# Altium PCB DC-DC StepDown in Box 45x30x15 (moto).PcbDoc
Units mm, origin at the board's own origin, x right, y up, seen from the top; angles counter-clockwise.
Board outline 42 x 27 mm, 2 copper layers (Top Layer, Bottom Layer); 5 components, 4 nets, 22 pads, 0 vias.
Unrouted connection lines stored in the file: 1.
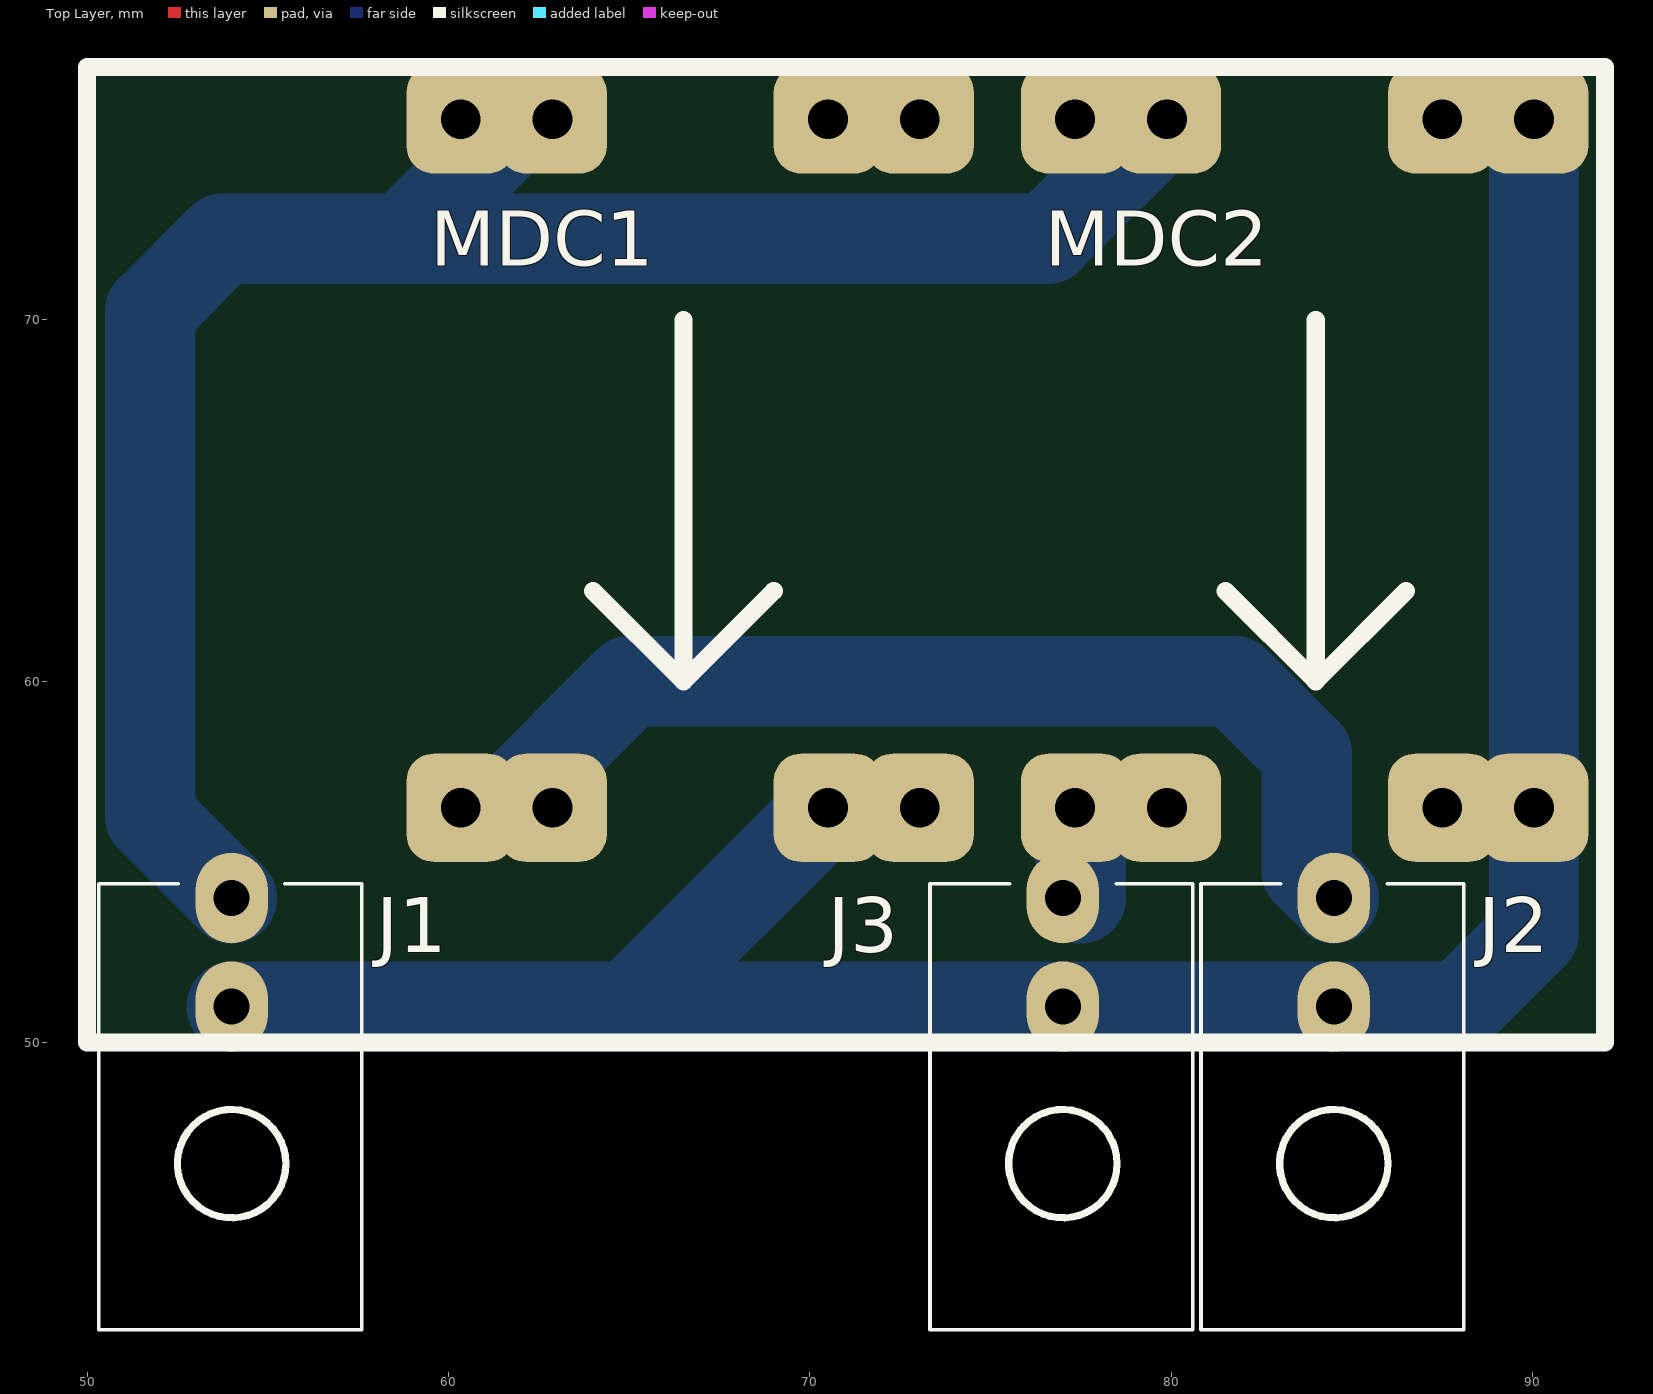
[diagram p0: Top Layer view]
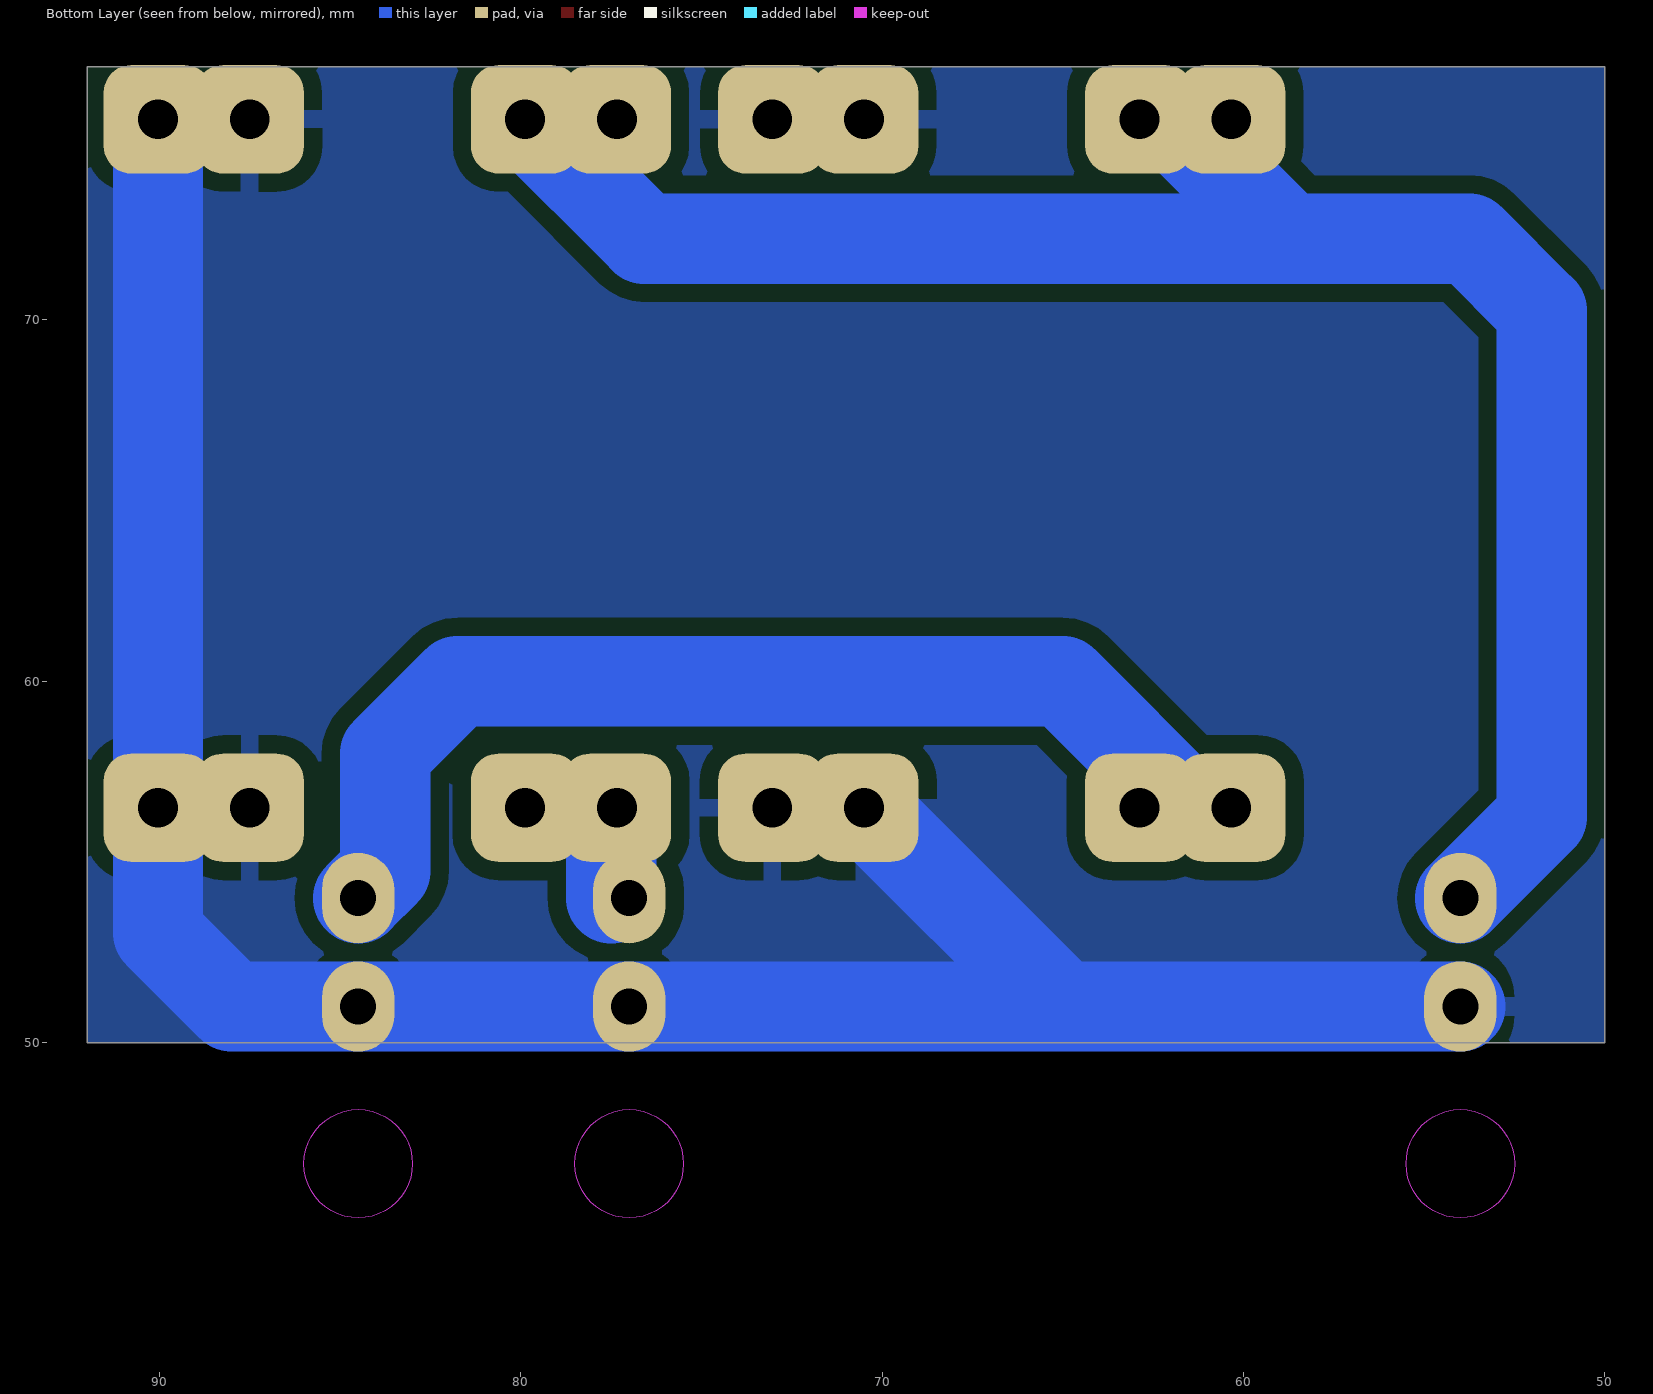
[diagram p1: Bottom Layer view, seen from below]

## Layer stack, top to bottom
Top Solder: solder mask 0.0102, Solder Resist, Dk 3.5
Top Layer: signal copper 0.0356
Dielectric 1: dielectric 0.32, FR-4, Dk 4.8
Bottom Layer: signal copper 0.0356
Bottom Solder: solder mask 0.0102, Solder Resist, Dk 3.5

## Board outline
50,50 92,50 92,77 50,77

## Design rules (kind name [scope] priority, off if disabled: settings)
Clearance [All] p1: gap=0.5 ignorepadtopadclearanceinfootprint=FALSE
ComponentClearance [All] p1: gap=0.01 collisioncheckmode=3 verticalgap=0.2 showdistances=FALSE
Height [All] p1: minheight=0 maxheight=25 prefheight=12.7
HoleSize [All] p1: absolutevalues=TRUE maxlimit=3.2 minlimit=0.4 maxpercent=80.000 minpercent=20.000
HoleToHoleClearance [All] p1: gap=0.2 allowstackedmicrovias=TRUE
PlaneClearance [All] p1: clearance=0.5
PlaneConnect [All] p1: planeconnectstyle=Relief reliefexpansion=0.508 reliefentries=4 reliefconductorwidth=0.5 reliefairgap=0.5
PolygonConnect [All] p1: connectstyle=Relief reliefconductorwidth=0.5 reliefentries=4 polygonreliefangle="90 Angle" airgapwidth=0.5
RoutingVias [All] p1: holewidth=0.7 width=1.5 viastyle="Through Hole" minholewidth=0.4 minwidth=0.4 maxholewidth=3.2 maxwidth=7
SilkToSilkClearance [All] p1: silktosilkclearance=0.05
SilkToSolderMaskClearance [IsPad] p1: minsilkscreentomaskgap=0.2 clearancetoexposedcopper=TRUE
SolderMaskExpansion [All] p1: expansion=0.1
Width [All] p1: maxlimit=3 minlimit=0.2 preferedwidth=0.5
22 further rules are at their usual default settings.

## Components (designator, comment, footprint, x,y, rotation, side; value= is the part's Value field where it differs from the comment)
J1 "IN" "Molex Micro-Fit 3.0 - 2 pin D R" 54,51 r0 top
J2 "Out 1" "Molex Micro-Fit 3.0 - 2 pin D R" 84.5,51 r0 top
J3 "Out 2" "Molex Micro-Fit 3.0 - 2 pin D R" 77,51 r0 top
MDC1 "DC-DC" DC-DC_MP1584N 60.34,75.55 r270 top
MDC2 "DC-DC" DC-DC_MP1584N 77.34,75.55 r270 top

## Footprints (in the part's own frame and the unit in brackets; to place one, negate y for a bottom-side part, rotate by r counter-clockwise, add the part's x,y. Pads: shape width x height; smd on the part's side, far side on the other; paste and mask are expansions set on the pad)
DC-DC_MP1584N [mm]
  rrect50% 3x3 hole 1.1: GND(0,12.7) GND(0,10.16) GND(19.05,10.16) GND(19.05,12.7) IN(0,2.54) IN(0,0) Out(19.05,0) Out(19.05,2.54)
  body extent -1.27,-1.27 20.3,14.07, height 6.7
"Molex Micro-Fit 3.0 - 2 pin D R" [mm]
  oval 2x2.5 hole 1: 1(0,0) 2(0,3)
  Keep-Out Layer board cut-out: -1.5,-4.35 -1.386,-4.924 -1.061,-5.411 -0.574,-5.736 0,-5.85 0,-5.85 0.574,-5.736 1.061,-5.411 1.386,-4.924 1.5,-4.35 1.5,-4.35 1.386,-3.776 1.061,-3.289 0.574,-2.964 0,-2.85 0,-2.85 -0.574,-2.964 -1.061,-3.289 -1.386,-3.776 -1.5,-4.35
  silkscreen extent -3.67,-8.95 3.6,3.4, body extent -3.6,-8.95 3.55,3.3, height 8.83

## Part data
J1 J2 J3: library part "Micro-Fit 2R (1x2)", "Horisontal, Dbl line, Male - 3mm", Part Number=430450200, Name="Micro-Fit 3.0", url=http://www.molex.com/molex/products/datasheet.jsp?part=active/0430450200_PCB_HEADERS.xml
MDC1 MDC2: library part "DC-DC MP1584N", "DC-DC StepDown"

## Nets (pads, with @x,y where several pads share a name; then routed paths per layer and width w, separated by ;. In a path a pad name is that pad's centre, name@x,y a point inside that pad or via, vN(x,y) a via of type N, cw(c..) or ccw(c..) an arc to the next point about the centre after c; other vN are vias at no path point)
+12v: J1.2 MDC1.IN MDC2.IN | length 52.1
  Bottom Layer w2.5: J1.2 51.75,56.25 51.75,70.25 53.75,72.25 58.75,72.25 ; MDC1.IN@62,75.5 58.75,72.25 ; MDC2.IN@79.88,75.55 76.58,72.25 58.75,72.25
GND: J1.1 J2.1 J3.1 MDC1.GND MDC2.GND | length 67.2
  Bottom Layer w2.5: J1.1 65,51 ; MDC1.GND@70.5,56.5 65,51 ; MDC2.GND@90.04,75.55 90.04,56.5 90.04,53.04 88,51 J2.1 J3.1 65,51
Out1: J2.2 MDC1.Out | length 28.9
  Bottom Layer w2.5: MDC1.Out@61.45,56.45 65,60 81.75,60 83.75,58 83.75,54.75 J2.2
Out2: J3.2 MDC2.Out | length 2.6
  Bottom Layer w2.5: MDC2.Out@77.34,56.5 77.5,56.34 J3.2@77.5,54

## Polygon pours and split planes (outlines as drawn)
GND on Bottom Layer "Bottom Layer-No Net" (solid, pour order 0): 92,50 92,77 50,77 50,50

## Other copper
Top Layer:
  text ".Layer_Name" at 76.975,80.45 h1
Bottom Layer:
  text ".Layer_Name" at 64,80.75 h1

## Silkscreen, mask and mechanical layers (free items; w line width, h text height)
Top Overlay:
  lines w0.5: 64,62.5 66.5,60 ; 66.5,70 66.5,60 ; 69,62.5 66.5,60 ; 81.5,62.5 84,60 ; 84,70 84,60 ; 86.5,62.5 84,60 ; 50,50 50,77 92,77 92,50 50,50
  text ".Layer_Name" at 76.975,80.45 h1
Bottom Overlay:
  text ".Layer_Name" at 64,80.75 h1
Top Solder:
  text ".Layer_Name" at 76.975,80.45 h1
Bottom Solder:
  text ".Layer_Name" at 64,80.75 h1
Mechanical 2:
  text "42 x 27 mm" at 50,82.25 h1
  text "DC-DC (Moto Charger)" at 49.975,80.475 h1
  text ".Pcb_File_Name_No_Path" at 49.925,78.425 h1
Mechanical 3:
  text "42 x 27 mm" at 92,82.25 h1
  text "DC-DC (Moto Charger)" at 91.975,80.475 h1
  text ".Pcb_File_Name_No_Path" at 91.925,78.425 h1

## Dimensions
50,49 to 92,49 on Mechanical 2
49,77 to 49,50 on Mechanical 2
49,77 to 49,50 on Mechanical 3
50,49 to 92,49 on Mechanical 3